# Altium PCB CukSupply_PCB.PcbDoc
Units mil, origin at the board's own origin, x right, y up, seen from the top; angles counter-clockwise.
Board outline 1550 x 1500 mil, 2 copper layers (Top Layer, Bottom Layer); 14 components, 7 nets, 33 pads, 9 vias.
Unrouted connection lines stored in the file: 1.
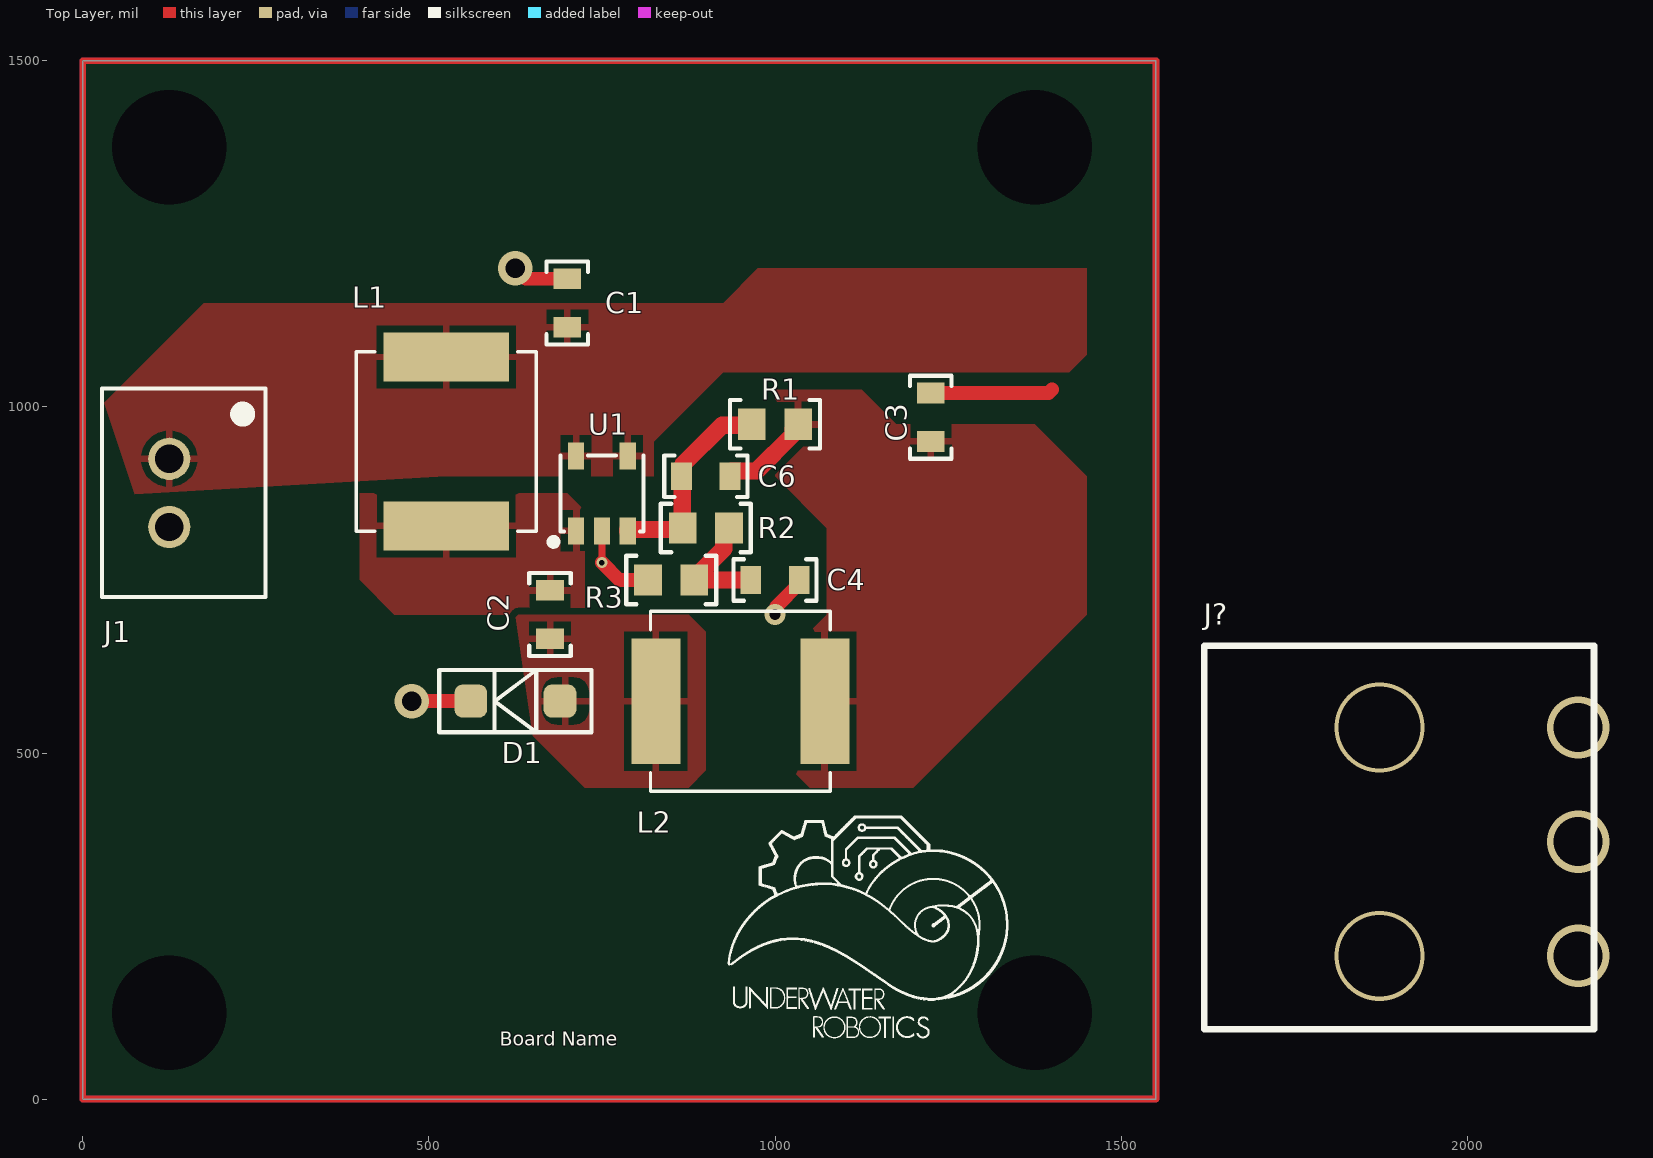
[diagram p0: Top Layer view]
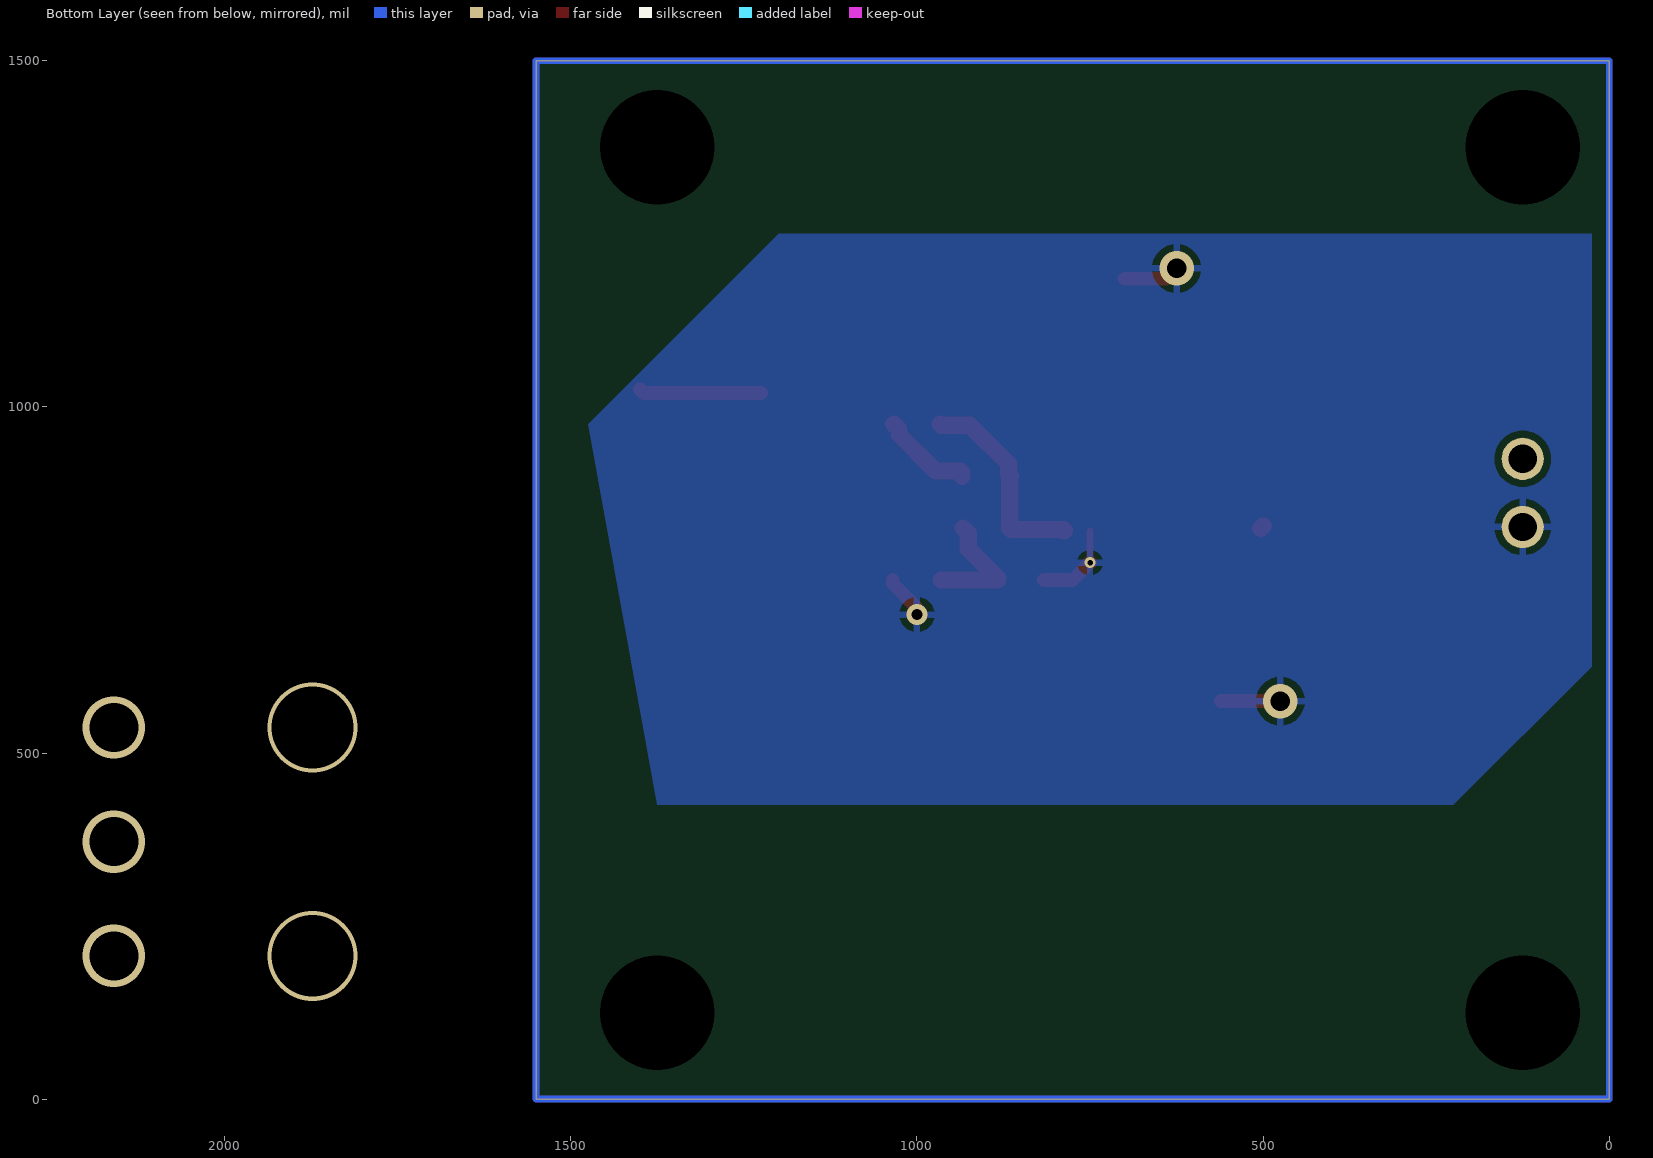
[diagram p1: Bottom Layer view, seen from below]

## Layer stack, top to bottom
Top Solder: solder mask 0.4, Solder Resist, Dk 3.5
Top Layer: signal copper 1.4
Dielectric 1: dielectric 12.6, FR-4, Dk 4.8
Bottom Layer: signal copper 1.4
Bottom Solder: solder mask 0.4, Solder Resist, Dk 3.5

## Board outline
0,0 1550,0 1550,1500 0,1500

## Design rules (kind name [scope] priority, off if disabled: settings)
Clearance [All] p1: gap=10 ignorepadtopadclearanceinfootprint=FALSE except(0: Arc-Hole Track-Hole SMDPad-Hole THPad-Hole Via-Hole Fill-Hole Poly-Hole Region-Hole Text-Hole)
PolygonConnect [All] p1: connectstyle=Relief reliefconductorwidth=10 reliefentries=4 polygonreliefangle="90 Angle" airgapwidth=10
RoomDefinition CukSupply_Sch [InComponentClass('CukSupply_Sch')] p1: confinementstyle=ConfineIn formatcopy=TRUE lockcomponents=FALSE outline 1600,75 2225,75 2225,750 1600,750
RoutingVias [All] p1: holewidth=28 width=50 viastyle="Through Hole" minholewidth=28 minwidth=50 maxholewidth=28 maxwidth=50
SolderMaskExpansion [All] p1: expansion=4 istentingtop=FALSE
Width [All] p1: maxlimit=100 minlimit=6 preferedwidth=10
30 further rules are at their usual default settings.

## Components (designator, comment, footprint, x,y, rotation, side; value= is the part's Value field where it differs from the comment)
C1 "10uF Ceramic 6.3V" CAPACITOR_0603 700,1150 r90 top
C2 "1uF Ceramic 16V" CAPACITOR_0603 675,700 r90 top value=1uF
C3 "22uF Ceramic" CAPACITOR_0603 1225,985 r90 top value=22uF
C4 "1uF Ceramic 16V" CAPACITOR_0603 1000,750 r0 top value=1uF
C6 "CAPACITOR_1000pF_0603" CAPACITOR_0603 900,900 r180 top value=1000pF
D1 "MBR0520LT3G" SOD-123 625,575 r180 top
J1 "B2B-XH-A(LF)(SN)" CONN_B2B-XH-A(LF)(SN)_JST 125,826.57 r270 top
J? "CONN_MOLEX_MINIFIT_JR_3POS" HEADER_3PIN_4.2MM 1625,375 r0 top
L1 "INDUCTOR_22uH_" INDUCTOR_0630-220MC 525,950 r270 top value=22uH
L2 "INDUCTOR_22uH_" INDUCTOR_0630-220MC 950,575 r0 top value=22uH
R1 "29.4k Ohm 1% 1/10W" RESISTOR_0603 1000,975 r180 top
R2 "1k Ohm 5% 1/8W" RESISTOR_0603 900,825 r0 top
R3 "9k Ohm 5% 1/10W" RESISTOR_0603 850,750 r180 top
U1 "LM2611 -5V Regulator" SOT-23-5 750,875 r90 top

## Footprints (in the part's own frame and the unit in brackets; to place one, negate y for a bottom-side part, rotate by r counter-clockwise, add the part's x,y. Pads: shape width x height; smd on the part's side, far side on the other; paste and mask are expansions set on the pad)
CAPACITOR_0603 [mil] "CAPACITOR 0603"
  rect 30x40 smd: 1(-35,0) 2(35,0)
  silkscreen extent -60,-30 60,30, body extent -31,-16 32,16, height 31
CONN_B2B-XH-A(LF)(SN)_JST [mil]
  round 61 hole 41 mask+4: 1(0,0) 2(-98.43,0)
  silkscreen extent -200,-97 101,139, body extent 0,0 10,10, height 10
HEADER_3PIN_4.2MM [mil] "CONN HEADER R/A 3POS 4.2MM"
  silkscreen extent -5,-274 558,280, body extent -1,-270 554,274, height 283
INDUCTOR_0630-220MC [mm]
  rect 1.8x4.6 smd: 1(-3.1,0) 2(3.1,0)
  silkscreen extent -3.3,-3.3 3.3,3.3, body extent -3.55,-3.3 3.55,3.3, height 3
RESISTOR_0603 [mil] "Resistor 0603"
  rect 40x45 smd: 1(-33.5,0) 2(33.5,0)
  silkscreen extent -65,-35 65,35, body extent -31,-16 32,16, height 16
SOD-123 [mm] "Schottky Diode SOD-123"
  rrect50% 1.2x1.22 smd: 1(-1.635,0) 2(1.635,0)
  silkscreen extent -2.79,-1.14 2.79,1.14, body extent -1.95,-0.9 1.95,0.9, height 1.18
SOT-23-5 [mm]
  rect 1x0.6 smd paste+0: 1(-1.375,0.95) 2(-1.375,0) 3(-1.375,-0.95) 4(1.375,-0.95) 5(1.375,0.95)
  silkscreen extent -1.9,-1.52 1.4,1.9, body extent -1.4,-1.45 1.4,1.45, height 1.2

## Part data
C1: library part CAPACITOR_10uF_0603, "Cap 10uF 6.3V +/-20% / Ceramic 0603", Supplier Part Number 1=1276-1119-1-ND, Tolerance="+/- 20%", Value (uF)=10uF, Voltage=6.3V, ComponentLink1Description=Digikey, ComponentLink1URL=https://www.digikey.com/en/products/detail/samsung-electro-mechanics/CL10A106MQ8NNNC/3886777, Made By="Flip B", Supplier 1=Digi-Key
C2 C4: library part CAPACITOR_1uF_0603, "Cap 1uF 16V +/-10% / Ceramic 0603", Supplier Part Number 1=399-7847-1-ND, Tolerance="+/- 10%", Voltage=16V, Made By="Flip B", Supplier 1=Digi-Key
C3: library part CAPACITOR_22uF_0603, "Cap 22uF 6.3V +/-20% / Ceramic 0603", Supplier Part Number 1=445-8028-1-ND, Tolerance="+/- 20%", Voltage=6.3V, Made By="Flip B", Supplier 1=Digi-Key
C6: "CAP 1000 pF 16V ±10% 0603"
D1: library part SCHOTTKY_20V_500mA, "Schottky Diode, 20V reverse breakdown, 500mA, Vf = 0.385V", Forward Current=500mA, Forward Voltage=0.385V, Package=SOD-123, Supplier Part Number 1=MBR0520LT3GOSCT-ND, ComponentLink1Description=Datasheet, ComponentLink1URL=https://www.onsemi.com/pdf/datasheet/mbr0520lt1-d.pdf, Made By="Flip B", Supplier 1=Digi-Key
J1: "CONN HEADER VERT 2POS 2.5MM", Supplier Part Number 1=455-2247-ND, Built_By=EMA_Cory, Copyright="Copyright (C) 2018 Accelerated Designs. All rights reserved", Created By="Dylan Trainor", Manufacturer_Part_Number=B2B-XH-A(LF)(SN), RefDes=RefDes, SourceLibrary=JST_2019-12-02, Supplier 1=Digi-Key, Type=DEV, Vendor=JST
J?: "Connector Header Through Hole, Right Angle 3 position 0.165\" (4.20mm)"
L1 L2: "22µH Inductor 3A 135mOhm Max Nonstandard", Package="Nonstandard ECS Inc.", Check_prices=https://www.snapeda.com/parts/ECS-MPIL0630-220MC/ECS%20Inc./view-part/3624015/?ref=eda, Digi-Key_Part_Number=XC2409CT-ND, MF="ECS Inc.", MP=ECS-MPIL0630-220MC, Purchase-URL=https://pricing.snapeda.com/search/part/ECS-MPIL0630-220MC/?ref=eda, SnapEDA_Link=https://www.snapeda.com/parts/ECS-MPIL0630-220MC/ECS%20Inc./view-part/3624015/?ref=snap
R1: library part RESISTOR_29.4k_0603, "RES 29.4k OHM 1% 1/10W 0603", Supplier Part Number 1=311-29.4KHRCT-ND, Tolerance="+/- 1%", Value  (Ohms)=29.4K, ComponentLink1Description=Digikey, ComponentLink1URL=https://www.yageo.com/upload/media/product/productsearch/datasheet/rchip/PYu-RC_Group_51_RoHS_L_11.pdf, Made By="Flip B", Supplier 1=Digi-Key, Wattage=1/10W
R2: library part RESISTOR_1K_0603, "RES 1k OHM 5% 1/8W 0603", Digikey Part Numer=CR0603-JW-104ELFTR-ND, Supplier Part Number 1=2019-RK73B1JTTD102JCT-ND, Tolerance="+/- 5%", Value  (Ohms)=1K, ComponentLink1Description=Datasheet, ComponentLink1URL=https://www.bourns.com/docs/product-datasheets/CRxxxxx.pdf, Made By="Robert Pafford", Supplier=Digikey, Supplier 1=Digi-Key, Wattage=1/8W
R3: library part RESISTOR_10K_0603, "RES 9k OHM 5% 1/10W 0603", Digikey Part Numer=CR0603-JW-104ELFTR-ND, Supplier Part Number 1=2019-RK73B1JTTD103JCT-ND, Tolerance="+/- 5%", Value  (Ohms)=9K, ComponentLink1Description=Datasheet, ComponentLink1URL=https://www.bourns.com/docs/product-datasheets/CRxxxxx.pdf, Made By="Robert Pafford", Supplier=Digikey, Supplier 1=Digi-Key, Wattage=1/8W
U1: library part LM2611BMFX/NOPB, "900-mA -5Vswitching voltage regulator 1.4MHz SOT23-5", Input Voltage=2.7V-14V, Output Current=900mA, Output Voltage="-1.23V - -22V", Supplier Part Number 1=296-35161-1-ND, Switching Frequency=1.4MHz, Made By="Flip B", Supplier 1=Digi-Key

## Free pads (board coordinates)
  round 60 hole 165: 1(125,125) 1(125,1375) 1(1375,125) 1(1375,1375)

## Via types
v1: diameter 90, hole 71, Top Layer to Bottom Layer, 3 vias
v2: diameter 130, hole 118, Top Layer to Bottom Layer, 2 vias
v3: diameter 50, hole 28, Top Layer to Bottom Layer, 2 vias
v4: diameter 30, hole 16, Top Layer to Bottom Layer, 1 vias
v5: diameter 16, hole 8, Top Layer to Bottom Layer, 1 vias

## Nets (pads, with @x,y where several pads share a name; then routed paths per layer and width w, separated by ;. In a path a pad name is that pad's centre, name@x,y a point inside that pad or via, vN(x,y) a via of type N, cw(c..) or ccw(c..) an arc to the next point about the centre after c; other vN are vias at no path point)
+5: C1.1 J1.2 L1.1 U1.4 U1.5
-5: C3.1 C6.1 L2.2 R1.1 | length 136.8
  Top Layer w25: C6.1 935,905 937.5,907.5 973.32,907.5 1026,960.18 1026,967.5 R1.1
GND: C1.2 C3.2 C4.2 D1.2 J1.1 R3.2 U1.2 | length 531.1
  Top Layer w10: v5(750,775) U1.2
  Top Layer w20: v3(475,575) D1.2 ; v3(625,1200) 640,1185 C1.2 ; v5(750,775) 775,750 R3.2 ; v4(1000,700) 1001.91,701.91 1001.91,711.91 1035,745 C4.2 ; C3.2 1395,1020 1400,1025
NetC2_1: C2.1 D1.1 L2.1
NetC2_2: C2.2 L1.2 U1.1 | length 5
  Top Layer w25: L1.2@500,827.95 L1.2@503.54,824.41
NetC4_1: C4.1 R2.2 R3.1 | length 177.2
  Top Layer w25: R2.2 926,817.5 926,795 883.5,752.5 R3.1 C4.1
NetC6_2: C6.2 R1.2 R2.1 U1.3 | length 298.6
  Top Layer w25: U1.3 787.4,822.24 788.09,822.93 864.43,822.93 R2.1 865.75,825.75 865.75,899.25 C6.2 867.5,902.5 867.5,917.5 923.64,973.64 965.14,973.64 R1.2
copper on no net:
  other v1: 2160,207 2160,372 2160,537
  other v2: 1873,207 1873,537

## Polygon pours and split planes (outlines as drawn)
GND on Bottom Layer "GND_L02_P000" (solid, pour order 0): 25,1250 1200,1250 1475,975 1375,425 225,425 25,625
NetC2_2 on Top Layer "NETC2_2_L01_P006" (solid, pour order 6): 400,875 700,875 725,850 725,700 450,700 400,750
-5 on Top Layer "-5_L01_P008" (solid, pour order 8): 1000,1025 1000,900 1075,825 1075,700 1050,675 1025,675 1025,475 1050,450 1200,450 1450,700 1450,900 1375,975 1175,975 1125,1025
NetC2_1 on Top Layer "NETC2_1_L01_P007" (solid, pour order 7): 875,450 725,450 650,525 625,700 750,700 875,700 900,675 900,475
+5 on Top Layer "+5_L01_P004" (solid, pour order 4): 75.48,873.56 31.25,1006.25 175,1150 925,1150 975,1200 1450,1200 1450,1075 1425,1050 925,1050 825,950 825,900 525,900

## Other copper
Multi-Layer:
  the board outline again, w10

## Silkscreen, mask and mechanical layers (free items; w line width, h text height)
Top Overlay:
  drawing of 19 lines, arcs and shapes, not listed
  text "Board Name" at 602,77 h20